# EAGLE board Autopilot (EAGLE 9.1.3)
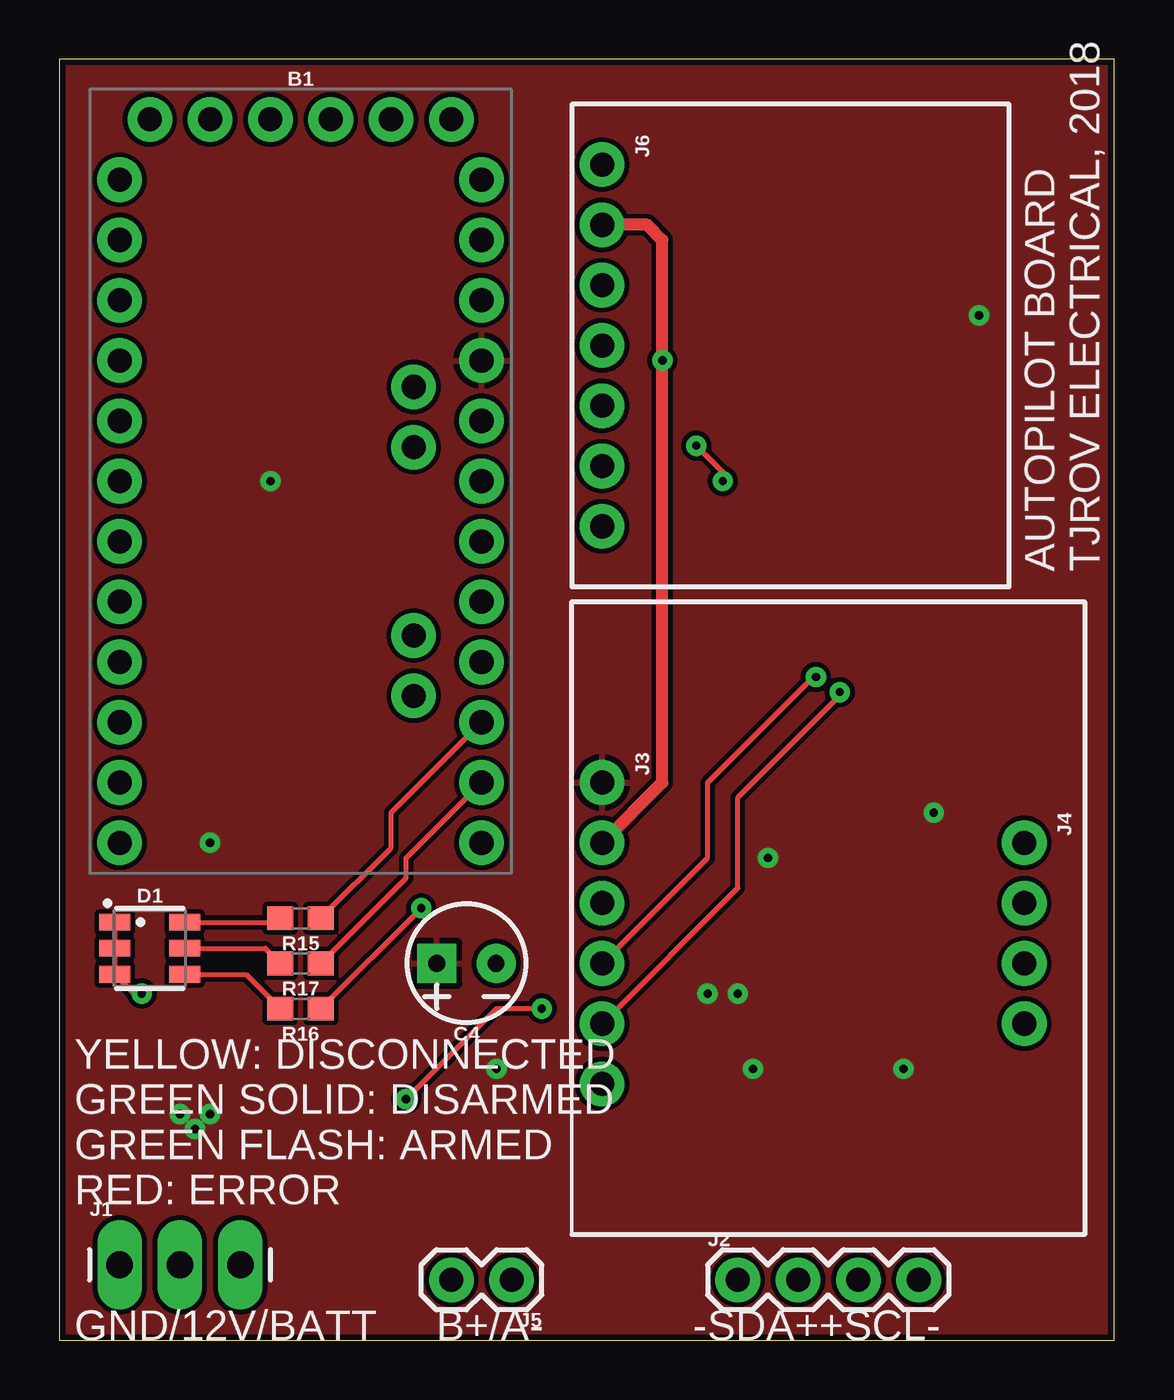
[diagram p0: board, top side]
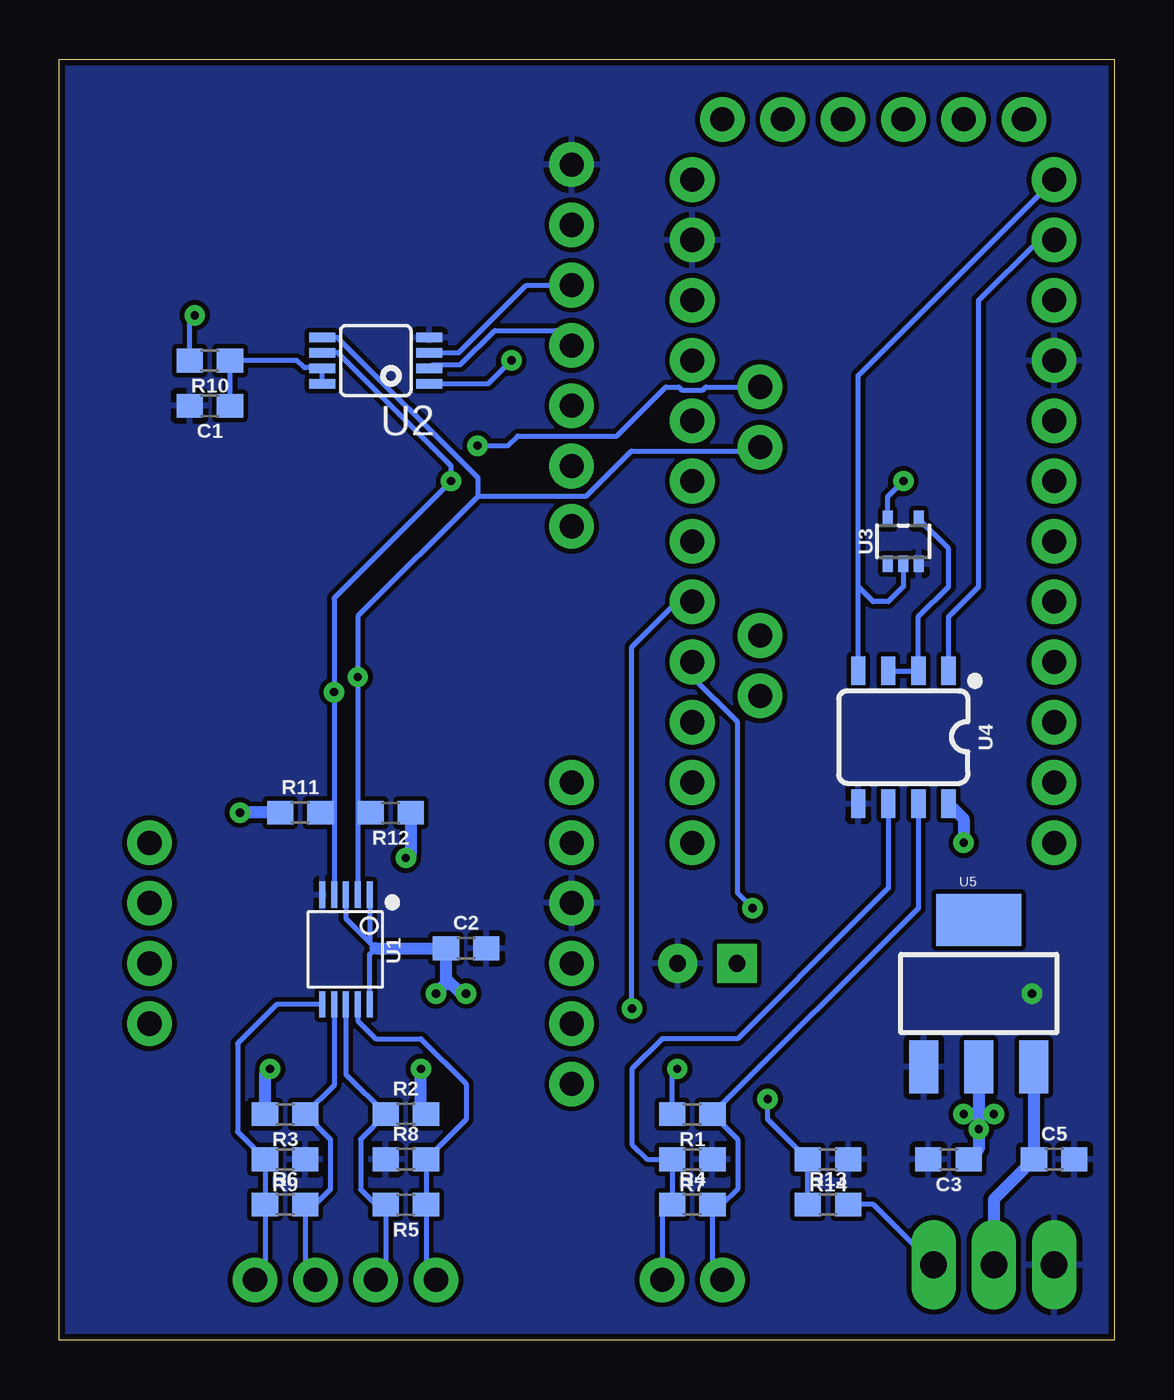
[diagram p1: board, bottom side, seen from below]

Size 44.44 x 53.97 mm. Coordinates in mm from the lower left corner, seen from the top.
Outline: 0,0 44.44,0 44.44,53.97 0,53.97 0,0
Copper layers (1*16): Top 0.035mm / dielectric 1.5mm / Bottom 0.035mm
Design rules "SparkFun": minimum track width 8mil, minimum drill 20mil, track to track 8mil, track to pad 8mil, pad to pad 8mil, via to via 8mil, smd to smd 8mil, copper to edge 10mil, drill to drill 8mil, minimum pad ring 12mil, minimum via ring 10mil, stop-mask expansion 4mil, vias tented up to drill 25mil, thermal gap 10mil

## Footprints (pad centres in the part's own frame; a part is rotated, then mirrored left to right if it is on the bottom)
ARDUINO_PRO_MINI = drill 1.016 pad 1.88: 1 -7.62,12.7; 2 -7.62,10.16; 3 -7.62,7.62; 4 -7.62,5.08; 5 -7.62,2.54; 6 -7.62,0; 7 -7.62,-2.54; 8 -7.62,-5.08; 9 -7.62,-7.62; 10 -7.62,-10.16; 11 -7.62,-12.7; 12 -7.62,-15.24; 13 7.62,-15.24; 14 7.62,-12.7; 15 7.62,-10.16; 16 7.62,-7.62; 17 7.62,-5.08; 18 7.62,-2.54; 19 7.62,0; 20 7.62,2.54; 21 7.62,5.08; 22 7.62,7.62; 23 7.62,10.16; 24 7.62,12.7; A4 4.763,1.429; A5 4.763,3.969; A6 4.763,-9.049; A7 4.763,-6.509; BLK -6.35,15.24; GND -3.81,15.24; GRN 6.35,15.24; RXI 1.27,15.24; TXO 3.81,15.24; VCC -1.27,15.24
0603 = smd 1.1 x 1: 1 -0.85,0; 2 0.85,0
CPOL-RADIAL-2.5MM-5MM = drill 0.7 pad 1.651 square: 1 1.25,0 | drill 0.7 pad 1.651: 2 -1.25,0
PLCC-6-LED = smd 1.3 x 0.7: AB 1.475,1.1; AG 1.475,-1.1; AR 1.475,0; CB -1.475,1.1; CG -1.475,-1.1; CR -1.475,0
1X03_LONGPADS = drill 1.118 pad 1.88 long: 1 0,0; 2 2.54,0; 3 5.08,0
1X04 = drill 1.016 pad 1.88: 1 0,0; 2 2.54,0; 3 5.08,0; 4 7.62,0
1X06_NO_SILK = drill 1.016 pad 1.88: 1 0,0; 2 2.54,0; 3 5.08,0; 4 7.62,0; 5 10.16,0; 6 12.7,0
1X04_NO_SILK = drill 1.016 pad 1.88: 1 0,0; 2 2.54,0; 3 5.08,0; 4 7.62,0
1X02 = drill 1.016 pad 1.88: 1 0,0; 2 2.54,0
1X07_NO_SILK = drill 1.016 pad 1.88: 1 0,0; 2 2.54,0; 3 5.08,0; 4 7.62,0; 5 10.16,0; 6 12.7,0; 7 15.24,0
TSSOP10 = smd 1.1 x 0.25: 1 -2.259,1.018; 2 -2.259,0.517; 3 -2.259,0.018; 4 -2.259,-0.482; 5 -2.259,-0.988; 6 2.366,-0.988; 7 2.366,-0.482; 8 2.366,0.018; 9 2.366,0.517; 10 2.366,1.018
MSOP8 = smd 0.4 x 1.1: 1 -0.975,-2.25; 2 -0.325,-2.25; 3 0.325,-2.25; 4 0.975,-2.25; 5 0.975,2.25; 6 0.325,2.25; 7 -0.325,2.25; 8 -0.975,2.25
SOT353 = smd 0.42 x 0.7: 1 -0.65,-0.95; 2 0,-0.95; 3 0.65,-0.95; 4 0.65,0.95; 5 -0.65,0.95
SO08 = smd 0.6 x 1.2: 1 -1.905,-2.8; 2 -0.635,-2.8; 3 0.635,-2.8; 4 1.905,-2.8; 5 1.905,2.8; 6 0.635,2.8; 7 -0.635,2.8; 8 -1.905,2.8
SOT223 = smd 1.219 x 2.235: 1 -2.311,-3.099; 2 0,-3.099; 3 2.311,-3.099 | smd 3.6 x 2.2: 4 0,3.099

## Placement (x,y rotation side)
B1  ARDUINO_PRO_MINI  [ARDUINO_PRO_MINI]  10.16,36.2 0 top
C1  0.1uF  [0603]  38.1,39.37 180 bottom
C2  0.1uF  [0603]  27.3,16.51 0 bottom
C3  0.1uF  [0603]  6.99,7.62 180 bottom
C4  10uF  [CPOL-RADIAL-2.5MM-5MM]  17.14,15.88 180 top
C5  0.1uF  [0603]  2.54,7.62 0 bottom
D1  RGB  [PLCC-6-LED]  3.81,16.51 0 top
FRAME1  FRAME-LETTERNO_PACKAGE  [DUMMY]  26.67,-11.43 0 top  (outside the outline)
J1  [1X03_LONGPADS]  2.54,3.17 0 top
J2  [1X04]  28.57,2.54 0 top
J3  [1X06_NO_SILK]  22.86,23.5 270 top
J4  [1X04_NO_SILK]  40.64,20.95 270 top
J5  [1X02]  19.05,2.54 180 top
J6  [1X07_NO_SILK]  22.86,49.53 270 top
R1  680  [0603]  17.78,9.53 180 bottom
R2  680  [0603]  29.84,9.53 0 bottom
R3  680  [0603]  34.92,9.53 180 bottom
R4  100  [0603]  17.78,5.71 0 bottom
R5  100  [0603]  29.84,5.71 180 bottom
R6  100  [0603]  34.92,5.71 0 bottom
R7  680  [0603]  17.78,7.62 180 bottom
R8  680  [0603]  29.84,7.62 0 bottom
R9  680  [0603]  34.92,7.62 180 bottom
R10  47k  [0603]  38.1,41.27 180 bottom
R11  4.7k  [0603]  34.29,22.23 0 bottom
R12  4.7k  [0603]  30.48,22.23 180 bottom
R13  47k  [0603]  12.06,5.71 0 bottom
R14  4.7k  [0603]  12.06,7.62 180 bottom
R15  220  [0603]  10.16,17.78 180 top
R16  220  [0603]  10.16,13.97 180 top
R17  220  [0603]  10.16,15.88 180 top
U1  PCA9615  [TSSOP10]  32.38,16.51 270 bottom
U2  [MSOP8]  31.11,41.27 90 bottom
U3  74HC1G04  [SOT353]  8.89,33.66 0 bottom
U4  MAX3485CSA  [SO08]  8.89,25.4 180 bottom
U5  V_REG_LD1117VXXLD1117-SMD  [SOT223]  5.71,14.61 0 bottom

## Library data of the parts
B1 = SparkFun-Boards
C1-C3 C5 = SparkFun-Capacitors; PROD_ID: CAP-00810
C4 = SparkFun-Capacitors; PROD_ID: CAP-08440
D1 = SparkFun-LED; PROD_ID: DIO-12113
FRAME1 = SparkFun-Aesthetics; DESIGNER: Nobody; VERSION: v01
J1 J5 J6 = SparkFun-Connectors
J2 J4 = SparkFun-Connectors; PROD_ID: CONN-09696
J3 = SparkFun-Connectors; PROD_ID: CONN-08437
R1-R3 R7-R9 = SparkFun-Resistors; PROD_ID: RES-09333
R4-R6 = SparkFun-Resistors; PROD_ID: RES-12438
R10 R13 = SparkFun-Resistors; PROD_ID: RES-07828
R11 R12 R14 = SparkFun-Resistors; PROD_ID: RES-07857
R15-R17 = SparkFun-Resistors; PROD_ID: RES-07861
U1 = SparkFun-IC-Comms; PROD_ID: IC-13899
U2 = SparkFun-IC-Comms
U3 = SparkFun-IC-Logic; PROD_ID: COMP-08268
U4 = SparkFun-IC-Comms; PROD_ID: IC-09388
U5 = SparkFun-IC-Power; PROD_ID: VREG-13917

## Nets
3V3: J3.2 J6.2 U2.1
12V: C5.1 J1.2 U5.3
485A: J5.1 R4.1 R7.2 U4.6
485B: J5.2 R1.1 R4.2 U4.7
BATT: J1.3 R13.2
BLUE: B1.16 R16.1
GND: B1.4 B1.23 C1.2 C2.2 C3.2 C4.2 C5.2 D1.CB D1.CG D1.CR J1.1 J3.3 J6.1 R7.1 R8.1 R9.1 R14.1 U1.5 U2.4 U3.3 U4.5 U5.1
GREEN: B1.14 R17.1
N$1: U3.4 U4.2 U4.3
N$4: D1.AB R15.2
N$5: D1.AG R16.2
N$6: D1.AR R17.2
N$19: C1.1 R10.1 U2.7 U2.8
RAW: B1.24
RED: B1.15 R15.1
RX: B1.2 U4.1
SCL: B1.A5 J3.5 R11.2 U1.4 U2.6
SCL3V3: J6.4 U2.2
SCL+: J2.3 R3.1 R6.2 U1.7
SCL-: J2.4 R6.1 R9.2 U1.6
SDA: B1.A4 J3.4 R12.2 U1.2 U2.5
SDA3V3: J6.3 U2.3
SDA+: J2.2 R2.1 R5.2 U1.8
SDA-: J2.1 R5.1 R8.2 U1.9
TX: B1.1 U3.2 U4.4
VCC: B1.21 C2.1 C3.1 C4.1 J3.1 R1.2 R2.2 R3.2 R10.2 R11.1 R12.1 U1.1 U1.3 U1.10 U3.5 U4.8 U5.2
VOLTAGE_SENSOR: B1.17 R13.1 R14.2

## Tracks (layer width: path | path; a pad name or v marks a point on that pad's centre or on a via)
3V3  (via drill 0.35)
  Top 0.508: J3.2 25.4,23.5 v25.4,41.27 25.4,46.35 24.77,46.99 J6.2
  Bottom 0.203: U2.1 26.38,40.3 v25.4,41.27
12V
  Bottom 0.203: 3.4,7.63 C5.1
  Bottom 0.508: U5.3 3.4,7.63 | C5.1 5.08,5.93 J1.2
485A
  Bottom 0.203: U4.6 9.53,19.05 10.79,17.78 15.88,12.7 19.05,12.7 20.32,11.43 20.32,8.26 19.68,7.62 R7.2 R4.1 19.05,5.29 J5.1
485B
  Bottom 0.203: U4.7 8.26,18.2 R1.1 15.88,8.47 15.88,6.35 16.51,5.71 R4.2 16.93,2.96 J5.2
BATT
  Bottom 0.203: J1.3 10.16,5.71 R13.2
BLUE  (via drill 0.35)
  Top 0.203: R16.1 v15.24,18.2
  Bottom 0.203: v15.24,18.2 15.88,18.84 15.88,26.04 17.78,27.94 B1.16
GND  (via drill 0.35)
  Top 0.203: D1.CB D1.CR D1.CG 3.14,14.61 v3.47,14.61
  pour Bottom: -5.08,-2.54 48.26,-2.54 48.26,55.88 -5.08,55.88
GREEN
  Top 0.203: R17.1 14.61,19.47 14.61,20.32 B1.14
N$1
  Bottom 0.203: U4.3 U4.2 8.26,30.48 6.99,31.75 6.99,33.35 U3.4
N$4
  Top 0.203: D1.AB 9.14,17.61 R15.2
N$5
  Top 0.203: D1.AG 7.87,15.41 R16.2
N$6
  Top 0.203: D1.AR 8.68,16.51 R17.2
N$19
  Bottom 0.203: C1.1 R10.1 34.43,41.27 34.12,40.97 33.38,40.97 U2.7 U2.8
RED
  Top 0.203: R15.1 13.97,20.74 13.97,22.23 B1.15
RX
  Bottom 0.203: U4.1 6.99,30.48 5.71,31.75 5.71,43.81 3.17,46.35 B1.2
SCL  (via drill 0.35)
  Top 0.203: v26.82,37.69 27.94,36.57 v27.94,36.2 | J3.5 28.57,19.05 28.57,22.86 32.87,27.15 v32.87,27.3
  Bottom 0.203: 32.87,22.23 v32.87,27.3 32.87,31.27 v27.94,36.2 27.94,36.83 32.71,41.6 U2.6 | 32.87,22.23 U1.4 | B1.A5 17.2,40.16 17.34,40.03 18.22,40.03 18.36,40.16 18.89,40.16 20.95,38.1 25.14,38.1 25.55,37.69 v26.82,37.69 | R11.2 32.87,22.23
SCL3V3
  Bottom 0.203: U2.2 28.72,41.09 27.55,41.09 26.09,42.55 23.5,42.55 J6.4
SCL+
  Bottom 0.203: J2.3 34.08,2.96 R6.2 33.66,5.71 33.02,6.35 33.02,8.47 R3.1 32.87,10.73 U1.7
SCL-
  Bottom 0.203: J2.4 35.77,2.96 R6.1 R9.2 36.93,8.77 36.93,12.49 35.28,14.14 U1.6
SDA  (via drill 0.35)
  Top 0.203: J3.4 27.3,20.32 27.3,23.5 31.75,27.94 v31.87,27.94
  Bottom 0.203: B1.A4 15.08,37.47 20.34,37.47 22.24,35.57 26.8,35.57 | 26.8,35.57 31.87,30.5 v31.87,27.94 31.87,22.23 | 31.87,22.23 U1.2 | R12.2 31.87,22.23 | 26.8,35.57 26.8,36.33 32.73,42.25 U2.5
SDA3V3
  Bottom 0.203: U2.3 27.61,41.6 24.77,44.45 J6.3
SDA+
  Bottom 0.203: U1.8 32.37,11.2 R2.1 31.75,8.47 31.75,6.35 31.11,5.71 R5.2 30.7,2.96 J2.2
SDA-
  Bottom 0.203: U1.9 31.87,13.45 31.11,12.7 29.21,12.7 27.3,10.79 27.3,9.31 R8.2 R5.1 29,2.96 J2.1
TX
  Bottom 0.203: U4.4 10.79,31.75 | 10.79,31.75 10.79,40.64 B1.1 | U3.2 8.89,31.75 9.53,31.11 10.16,31.11 10.79,31.75
VCC  (via drill 0.35)
  Bottom 0.203: U1.1 31.37,16.76 | 31.37,16.76 31.11,16.51 31.37,16.26 U1.10 | U1.3 32.37,17.76 31.37,16.76 | R2.2 29.21,9.74 | R1.2 18.63,11.21 v18.41,11.43 | U3.5 9.54,35.55 v8.89,36.2 | R10.2 38.95,42.97 v38.73,43.18
  Bottom 0.508: 31.11,16.51 C2.1 28.16,15.24 | U5.2 5.71,9.53 | 5.71,9.53 v5.71,8.89 5.71,8.04 C3.1 | R11.1 v36.83,22.23 | R12.1 29.63,20.54 v29.84,20.32 | 28.16,15.24 28.16,15.03 v28.57,14.61 | 29.21,9.74 v29.21,11.43 | R3.2 35.77,11.21 v35.56,11.43 | U4.8 6.35,21.96 v6.35,20.95 | 5.71,9.53 v6.35,9.53 v5.08,9.53 | 28.16,15.24 27.52,14.61 v27.3,14.61
  pour Top: -5.08,-3.81 49.53,-3.81 49.53,57.15 -6.35,57.15 -6.35,-3.81
VOLTAGE_SENSOR  (via drill 0.35)
  Top 0.203: v14.61,10.16 18.41,13.97 v20.32,13.97
  Bottom 0.203: R13.1 R14.2 14.61,9.31 v14.61,10.16 | v20.32,13.97 20.32,29.21 18.41,31.11 B1.17

## Text on the board
tPlace: AUTOPILOT BOARD / TJROV ELECTRICAL, 2018 | YELLOW: DISCONNECTED / GREEN SOLID: DISARMED / GREEN FLASH: ARMED / RED: ERROR | GND/12V/BATT | B+/A- | -SDA++SCL-